# Altium PCB Peak Detector With Banking.PcbDoc (part 2 of 5)
Units mil, origin at the board's own origin, x right, y up, seen from the top; angles counter-clockwise.
Board outline 3330 x 2725 mil, 4 copper layers (TopLayer, GROUND, MidLayer1, BottomLayer); 549 components, 391 nets, 1594 pads, 460 vias.
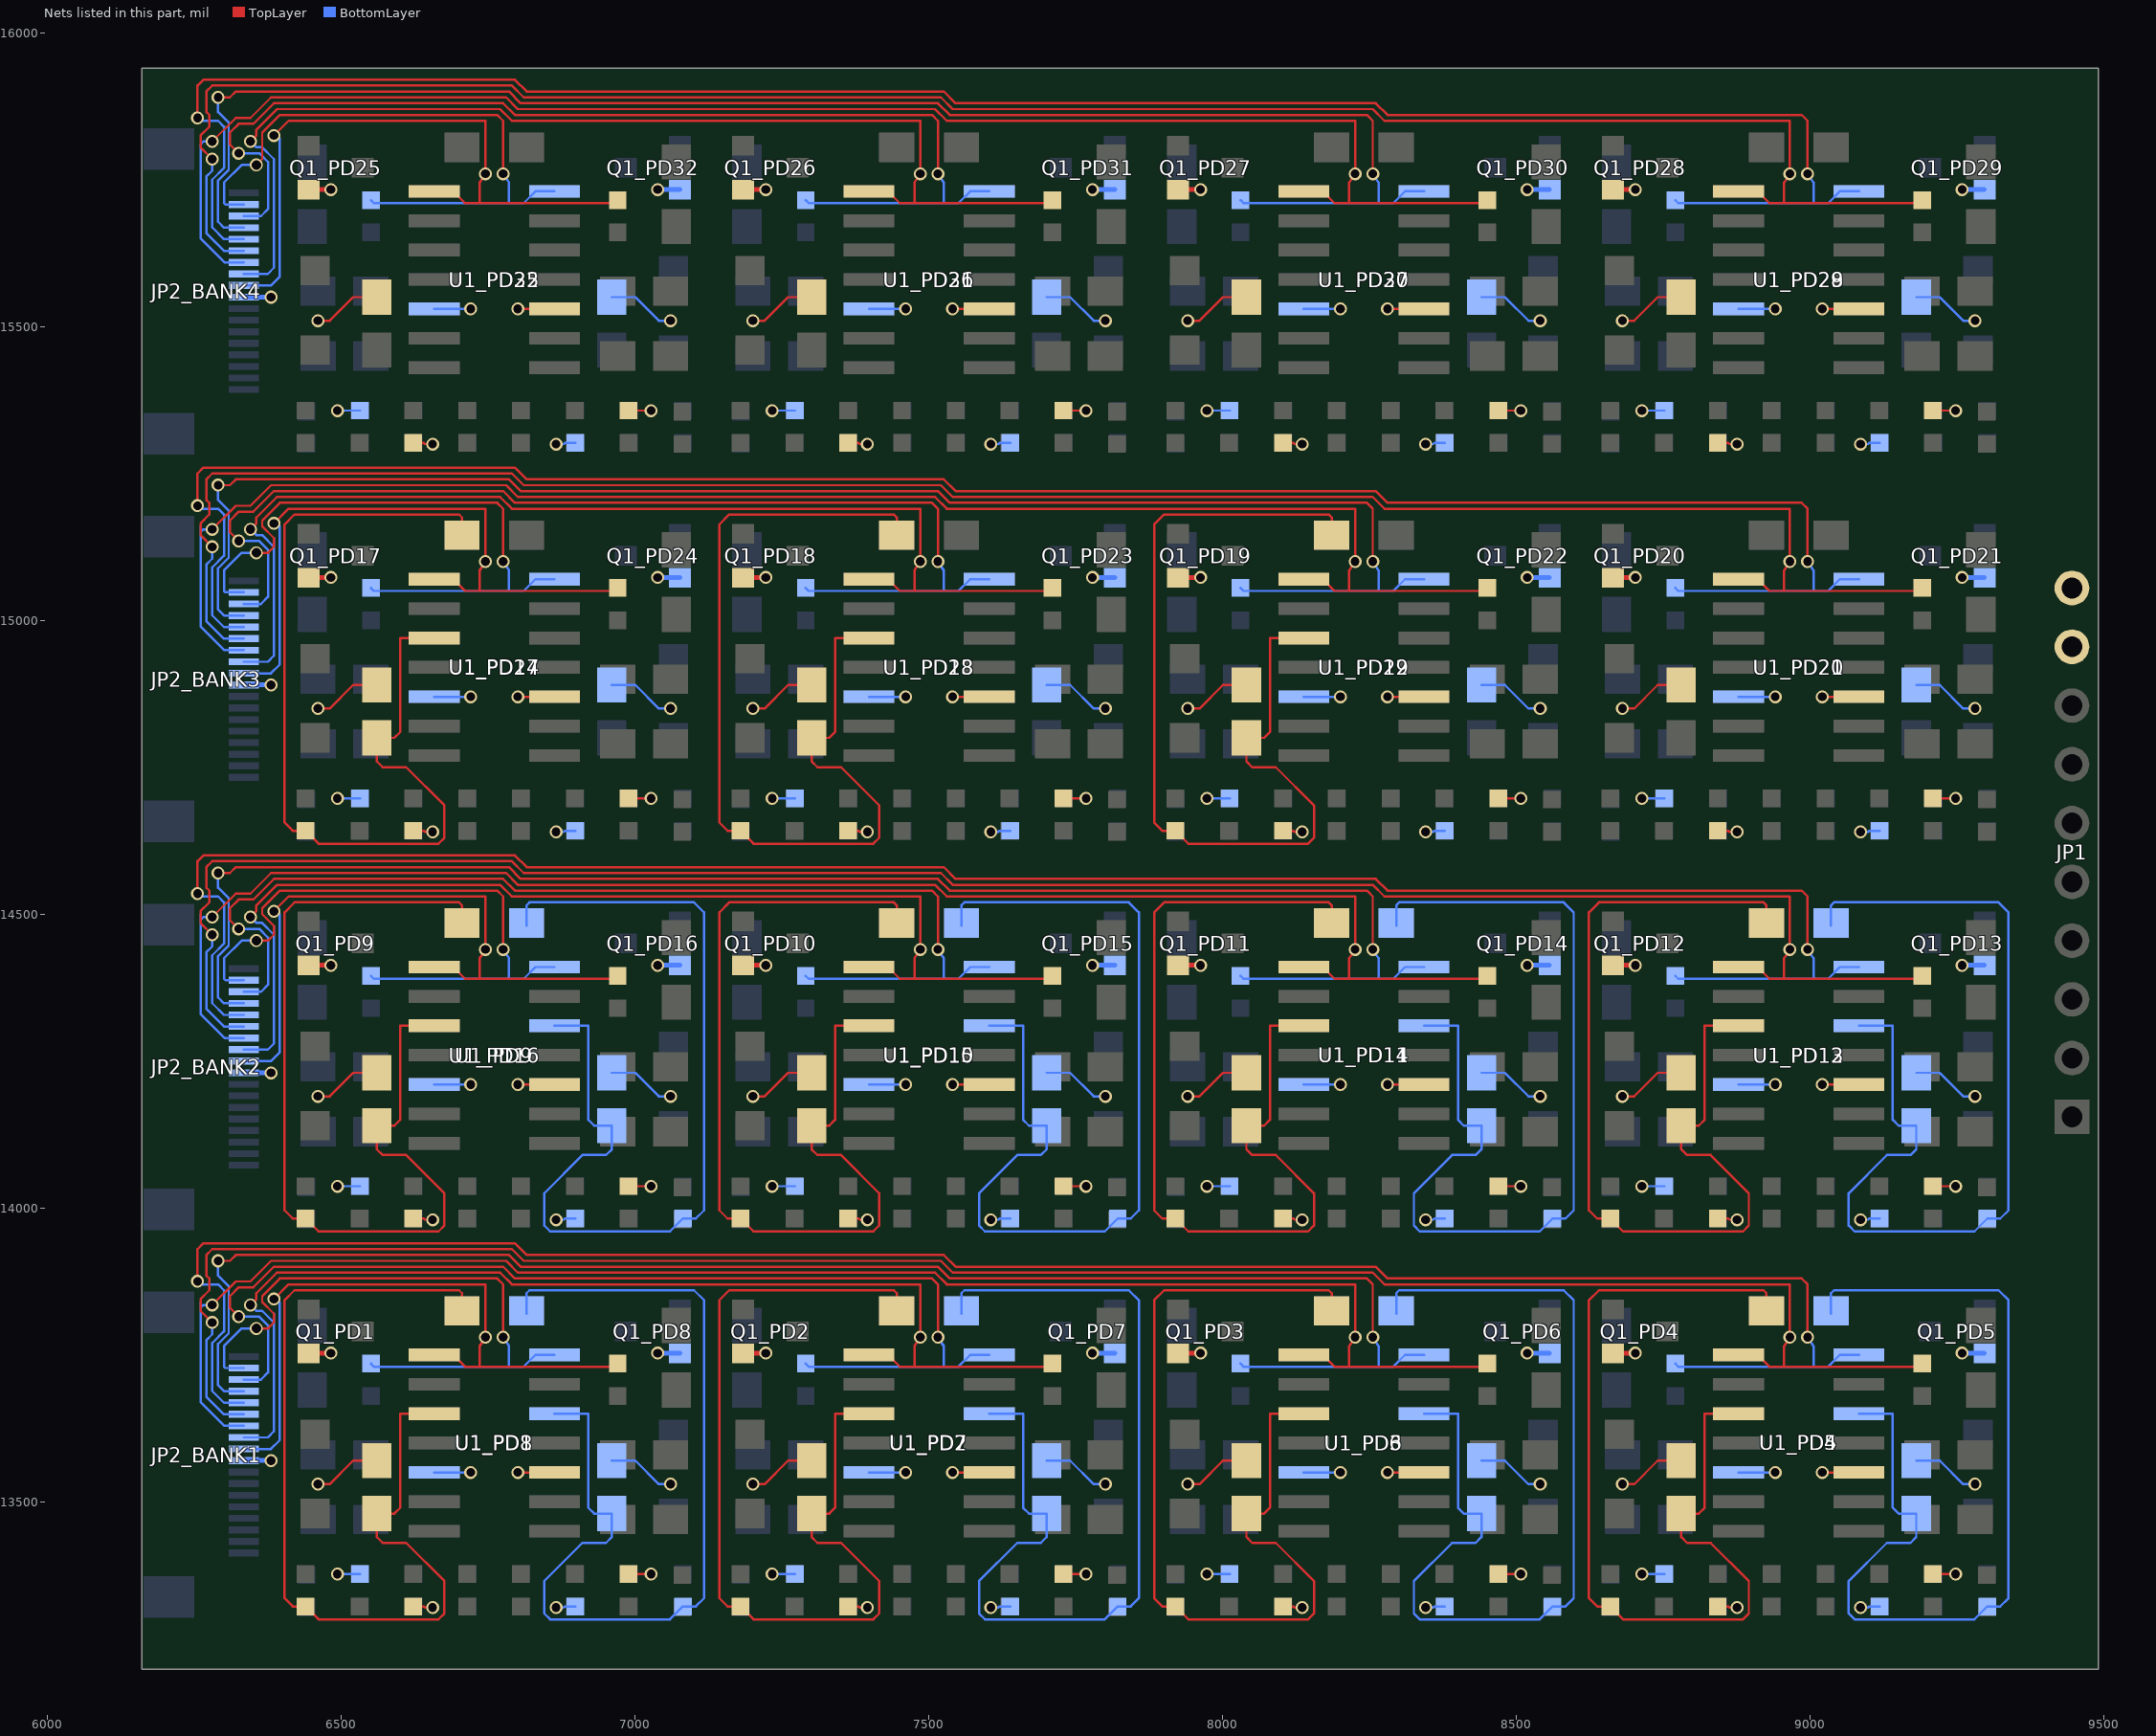
[diagram p4: the nets of this part, all layers, seen from the top]

## Components (designator, comment, footprint, x,y, rotation, side; value= is the part's Value field where it differs from the comment) (continued)
RPOT_PD16 "2.5K" 0603 6714.71,14036.99 r270 bottom (schematic designator RPOT)
RPOT_PD17 "2.5K" 0603 6805.29,14696.99 r270 top (schematic designator RPOT)
RPOT_PD18 "2.5K" 0603 7545.29,14696.99 r270 top (schematic designator RPOT)
RPOT_PD19 "2.5K" 0603 8285.29,14696.99 r270 top (schematic designator RPOT)
RPOT_PD20 "2.5K" 0603 9025.29,14696.99 r270 top (schematic designator RPOT)
RPOT_PD21 "2.5K" 0603 8934.71,14696.99 r270 bottom (schematic designator RPOT)
RPOT_PD22 "2.5K" 0603 8194.71,14696.99 r270 bottom (schematic designator RPOT)
RPOT_PD23 "2.5K" 0603 7454.71,14696.99 r270 bottom (schematic designator RPOT)
RPOT_PD24 "2.5K" 0603 6714.71,14696.99 r270 bottom (schematic designator RPOT)
RPOT_PD25 "2.5K" 0603 6805.29,15356.99 r270 top (schematic designator RPOT)
RPOT_PD26 "2.5K" 0603 7545.29,15356.99 r270 top (schematic designator RPOT)
RPOT_PD27 "2.5K" 0603 8285.29,15356.99 r270 top (schematic designator RPOT)
RPOT_PD28 "2.5K" 0603 9025.29,15356.99 r270 top (schematic designator RPOT)
RPOT_PD29 "2.5K" 0603 8934.71,15356.99 r270 bottom (schematic designator RPOT)
RPOT_PD30 "2.5K" 0603 8194.71,15356.99 r270 bottom (schematic designator RPOT)
RPOT_PD31 "2.5K" 0603 7454.71,15356.99 r270 bottom (schematic designator RPOT)
RPOT_PD32 "2.5K" 0603 6714.71,15356.99 r270 bottom (schematic designator RPOT)
U1_PD1 "TL074ACD" SO-G14/G3 6760,13600 r180 top (schematic designator U1)
U1_PD2 "TL074ACD" SO-G14/G3 7500,13600 r180 top (schematic designator U1)
U1_PD3 "TL074ACD" SO-G14/G3 8240,13600 r180 top (schematic designator U1)
U1_PD4 "TL074ACD" SO-G14/G3 8980,13600 r180 top (schematic designator U1)
U1_PD5 "TL074ACD" SO-G14/G3 8980,13600 r0 bottom (schematic designator U1)
U1_PD6 "TL074ACD" SO-G14/G3 8240,13600 r0 bottom (schematic designator U1)
U1_PD7 "TL074ACD" SO-G14/G3 7500,13600 r0 bottom (schematic designator U1)
U1_PD8 "TL074ACD" SO-G14/G3 6760,13600 r0 bottom (schematic designator U1)
U1_PD9 "TL074ACD" SO-G14/G3 6760,14260 r180 top (schematic designator U1)
U1_PD10 "TL074ACD" SO-G14/G3 7500,14260 r180 top (schematic designator U1)
U1_PD11 "TL074ACD" SO-G14/G3 8240,14260 r180 top (schematic designator U1)
U1_PD12 "TL074ACD" SO-G14/G3 8980,14260 r180 top (schematic designator U1)
U1_PD13 "TL074ACD" SO-G14/G3 8980,14260 r0 bottom (schematic designator U1)
U1_PD14 "TL074ACD" SO-G14/G3 8240,14260 r0 bottom (schematic designator U1)
U1_PD15 "TL074ACD" SO-G14/G3 7500,14260 r0 bottom (schematic designator U1)
U1_PD16 "TL074ACD" SO-G14/G3 6760,14260 r0 bottom (schematic designator U1)
U1_PD17 "TL074ACD" SO-G14/G3 6760,14920 r180 top (schematic designator U1)
U1_PD18 "TL074ACD" SO-G14/G3 7500,14920 r180 top (schematic designator U1)
U1_PD19 "TL074ACD" SO-G14/G3 8240,14920 r180 top (schematic designator U1)
U1_PD20 "TL074ACD" SO-G14/G3 8980,14920 r180 top (schematic designator U1)
U1_PD21 "TL074ACD" SO-G14/G3 8980,14920 r0 bottom (schematic designator U1)
U1_PD22 "TL074ACD" SO-G14/G3 8240,14920 r0 bottom (schematic designator U1)
U1_PD23 "TL074ACD" SO-G14/G3 7500,14920 r0 bottom (schematic designator U1)
U1_PD24 "TL074ACD" SO-G14/G3 6760,14920 r0 bottom (schematic designator U1)
U1_PD25 "TL074ACD" SO-G14/G3 6760,15580 r180 top (schematic designator U1)
U1_PD26 "TL074ACD" SO-G14/G3 7500,15580 r180 top (schematic designator U1)
U1_PD27 "TL074ACD" SO-G14/G3 8240,15580 r180 top (schematic designator U1)
U1_PD28 "TL074ACD" SO-G14/G3 8980,15580 r180 top (schematic designator U1)
U1_PD29 "TL074ACD" SO-G14/G3 8980,15580 r0 bottom (schematic designator U1)
U1_PD30 "TL074ACD" SO-G14/G3 8240,15580 r0 bottom (schematic designator U1)
U1_PD31 "TL074ACD" SO-G14/G3 7500,15580 r0 bottom (schematic designator U1)
U1_PD32 "TL074ACD" SO-G14/G3 6760,15580 r0 bottom (schematic designator U1)

## Footprints (in the part's own frame and the unit in brackets; to place one, negate y for a bottom-side part, rotate by r counter-clockwise, add the part's x,y. Pads: shape width x height; smd on the part's side, far side on the other; paste and mask are expansions set on the pad)
0603 [mil]
  rect 30x30 smd: 1(0,0) 2(55,0)
  silkscreen extent -35,-35 90,35
0805 [mil]
  rect 60x50 smd: 1(0.01,0) 2(90.01,0)
  silkscreen extent -50,-45 140,45
1206 [mil]
  rect 50x50 smd: 1(0,0) 2(135,0)
  silkscreen extent -50,-50 185,50
3216 [mil]
  rect 60x50 smd: 1(0.01,0) 2(-109.99,0)
  silkscreen extent -160,-45 50,45
FFC/SM0.5-2H18A [mm]
  rect 0.3x1.3 smd: 1(4.25,-1.625) 2(3.75,-1.625) 3(3.25,-1.625) 4(2.75,-1.625) 5(2.25,-1.625) 6(1.75,-1.625) 7(1.25,-1.625) 8(0.75,-1.625) 9(0.25,-1.625) 10(-0.25,-1.625) 11(-0.75,-1.625) 12(-1.25,-1.625) 13(-1.75,-1.625) 14(-2.25,-1.625) 15(-2.75,-1.625) 16(-3.25,-1.625) 17(-3.75,-1.625) 18(-4.25,-1.625)
  rect 1.8x2.2 smd: 19(6.15,1.625) 20(-6.15,1.625)
  silkscreen extent -6.75,-1.75 6.75,5.2
HDR1X10 [mm]
  rect 1.5x1.5 hole 0.9: 1(0,0)
  round 1.5 hole 0.9: 2(2.54,0) 3(5.08,0) 4(7.62,0) 5(10.16,0) 6(12.7,0) 7(15.24,0) 8(17.78,0) 9(20.32,0) 10(22.86,0)
  silkscreen extent -1.27,-1.27 24.13,1.27
SO-G3/D4.1 [mm]
  rect 0.85x0.95 smd: 1(0,1.175) 2(-0.95,-1.175) 3(0.95,-1.175)
  silkscreen extent -2,-2.05 2,2.83
SO-G14/G3 [mm]
  rect 2.2x0.55 smd: 1(-2.6,3.81) 2(-2.6,2.54) 3(-2.6,1.27) 4(-2.6,0) 5(-2.6,-1.27) 6(-2.6,-2.54) 7(-2.6,-3.81) 8(2.6,-3.81) 9(2.6,-2.54) 10(2.6,-1.27) 11(2.6,0) 12(2.6,1.27) 13(2.6,2.54) 14(2.6,3.81)
  silkscreen extent -1.1,-4.37 1.1,4.37

## Part data
C1_PD1 C1_PD2 C1_PD3 C1_PD4 C1_PD5 C1_PD6 C1_PD7 C1_PD8 C1_PD9 C1_PD10 C1_PD11 C1_PD12 C1_PD13 C1_PD14 C1_PD15 C1_PD16 C1_PD17 C1_PD18 C1_PD19 C1_PD20 C1_PD21 C1_PD22 C1_PD23 C1_PD24 C1_PD25 C1_PD26 C1_PD27 C1_PD28 C1_PD29 C1_PD30 C1_PD31 C1_PD32: library part CAP3, "Capacitor"
C4_PD1 C4_PD2 C4_PD3 C4_PD4 C4_PD5 C4_PD6 C4_PD7 C4_PD8 C4_PD9 C4_PD10 C4_PD11 C4_PD12 C4_PD13 C4_PD14 C4_PD15 C4_PD16 C4_PD17 C4_PD18 C4_PD19 C4_PD20 C4_PD21 C4_PD22 C4_PD23 C4_PD24 C4_PD25 C4_PD26 C4_PD27 C4_PD28 C4_PD29 C4_PD30 C4_PD31 C4_PD32 C5_PD1 C5_PD2 C5_PD3 C5_PD4 C5_PD5 C5_PD6 C5_PD7 C5_PD8 C5_PD9 C5_PD10 C5_PD11 C5_PD12 C5_PD13 C5_PD14 C5_PD15 C5_PD16 C5_PD17 C5_PD18 C5_PD19 C5_PD20 C5_PD21 C5_PD22 C5_PD23 C5_PD24 C5_PD25 C5_PD26 C5_PD27 C5_PD28 C5_PD29 C5_PD30 C5_PD31 C5_PD32 C6_PD1 C6_PD2 C6_PD3 C6_PD4 C6_PD5 C6_PD6 C6_PD7 C6_PD8 C6_PD9 C6_PD10 C6_PD11 C6_PD12 C6_PD13 C6_PD14 C6_PD15 C6_PD16 C6_PD17 C6_PD18 C6_PD19 C6_PD20 C6_PD21 C6_PD22 C6_PD23 C6_PD24 C6_PD25 C6_PD26 C6_PD27 C6_PD28 C6_PD29 C6_PD30 C6_PD31 C6_PD32: library part CAP, "Capacitor"
D1_PD1 D1_PD2 D1_PD3 D1_PD4 D1_PD5 D1_PD6 D1_PD7 D1_PD8 D1_PD9 D1_PD10 D1_PD11 D1_PD12 D1_PD13 D1_PD14 D1_PD15 D1_PD16 D1_PD17 D1_PD18 D1_PD19 D1_PD20 D1_PD21 D1_PD22 D1_PD23 D1_PD24 D1_PD25 D1_PD26 D1_PD27 D1_PD28 D1_PD29 D1_PD30 D1_PD31 D1_PD32 D2_PD1 D2_PD2 D2_PD3 D2_PD4 D2_PD5 D2_PD6 D2_PD7 D2_PD8 D2_PD9 D2_PD10 D2_PD11 D2_PD12 D2_PD13 D2_PD14 D2_PD15 D2_PD16 D2_PD17 D2_PD18 D2_PD19 D2_PD20 D2_PD21 D2_PD22 D2_PD23 D2_PD24 D2_PD25 D2_PD26 D2_PD27 D2_PD28 D2_PD29 D2_PD30 D2_PD31 D2_PD32: "Diode"
JP1: "Header, 10-Pin"
JP2_BANK1 JP2_BANK2 JP2_BANK3 JP2_BANK4: "Header, 9-Pin, Dual row"
Q1_PD1 Q1_PD2 Q1_PD3 Q1_PD4 Q1_PD5 Q1_PD6 Q1_PD7 Q1_PD8 Q1_PD9 Q1_PD10 Q1_PD11 Q1_PD12 Q1_PD13 Q1_PD14 Q1_PD15 Q1_PD16 Q1_PD17 Q1_PD18 Q1_PD19 Q1_PD20 Q1_PD21 Q1_PD22 Q1_PD23 Q1_PD24 Q1_PD25 Q1_PD26 Q1_PD27 Q1_PD28 Q1_PD29 Q1_PD30 Q1_PD31 Q1_PD32: "NPN BJT"
R1_PD1 R1_PD2 R1_PD3 R1_PD4 R1_PD5 R1_PD6 R1_PD7 R1_PD8 R1_PD9 R1_PD10 R1_PD11 R1_PD12 R1_PD13 R1_PD14 R1_PD15 R1_PD16 R1_PD17 R1_PD18 R1_PD19 R1_PD20 R1_PD21 R1_PD22 R1_PD23 R1_PD24 R1_PD25 R1_PD26 R1_PD27 R1_PD28 R1_PD29 R1_PD30 R1_PD31 R1_PD32 R2_PD1 R2_PD2 R2_PD3 R2_PD4 R2_PD5 R2_PD6 R2_PD7 R2_PD8 R2_PD9 R2_PD10 R2_PD11 R2_PD12 R2_PD13 R2_PD14 R2_PD15 R2_PD16 R2_PD17 R2_PD18 R2_PD19 R2_PD20 R2_PD21 R2_PD22 R2_PD23 R2_PD24 R2_PD25 R2_PD26 R2_PD27 R2_PD28 R2_PD29 R2_PD30 R2_PD31 R2_PD32 R3_PD1 R3_PD2 R3_PD3 R3_PD4 R3_PD5 R3_PD6 R3_PD7 R3_PD8 R3_PD9 R3_PD10 R3_PD11 R3_PD12 R3_PD13 R3_PD14 R3_PD15 R3_PD16 R3_PD17 R3_PD18 R3_PD19 R3_PD20 R3_PD21 R3_PD22 R3_PD23 R3_PD24 R3_PD25 R3_PD26 R3_PD27 R3_PD28 R3_PD29 R3_PD30 R3_PD31 R3_PD32 R4_PD1 R4_PD2 R4_PD3 R4_PD4 R4_PD5 R4_PD6 R4_PD7 R4_PD8 R4_PD9 R4_PD10 R4_PD11 R4_PD12 R4_PD13 R4_PD14 R4_PD15 R4_PD16 R4_PD17 R4_PD18 R4_PD19 R4_PD20 R4_PD21 R4_PD22 R4_PD23 R4_PD24 R4_PD25 R4_PD26 R4_PD27 R4_PD28 R4_PD29 R4_PD30 R4_PD31 R4_PD32 R5_PD1 R5_PD2 R5_PD3 R5_PD4 R5_PD5 R5_PD6 R5_PD7 R5_PD8 R5_PD9 R5_PD10 R5_PD11 R5_PD12 R5_PD13 R5_PD14 R5_PD15 R5_PD16 R5_PD17 R5_PD18 R5_PD19 R5_PD20 R5_PD21 R5_PD22 R5_PD23 R5_PD24 R5_PD25 R5_PD26 R5_PD27 R5_PD28 R5_PD29 R5_PD30 R5_PD31 R5_PD32 R6_PD1 R6_PD2 R6_PD3 R6_PD4 R6_PD5 R6_PD6 R6_PD7 R6_PD8 R6_PD9 R6_PD10 R6_PD11 R6_PD12 R6_PD13 R6_PD14 R6_PD15 R6_PD16 R6_PD17 R6_PD18 R6_PD19 R6_PD20 R6_PD21 R6_PD22 R6_PD23 R6_PD24 R6_PD25 R6_PD26 R6_PD27 R6_PD28 R6_PD29 R6_PD30 R6_PD31 R6_PD32 R8_PD1 R8_PD2 R8_PD3 R8_PD4 R8_PD5 R8_PD6 R8_PD7 R8_PD8 R8_PD9 R8_PD10 R8_PD11 R8_PD12 R8_PD13 R8_PD14 R8_PD15 R8_PD16 R8_PD17 R8_PD18 R8_PD19 R8_PD20 R8_PD21 R8_PD22 R8_PD23 R8_PD24 R8_PD25 R8_PD26 R8_PD27 R8_PD28 R8_PD29 R8_PD30 R8_PD31 R8_PD32 R88_PD1 R88_PD2 R88_PD3 R88_PD4 R88_PD5 R88_PD6 R88_PD7 R88_PD8 R88_PD9 R88_PD10 R88_PD11 R88_PD12 R88_PD13 R88_PD14 R88_PD15 R88_PD16 R88_PD17 R88_PD18 R88_PD19 R88_PD20 R88_PD21 R88_PD22 R88_PD23 R88_PD24 R88_PD25 R88_PD26 R88_PD27 R88_PD28 R88_PD29 R88_PD30 R88_PD31 R88_PD32 RPOT_PD1 RPOT_PD2 RPOT_PD3 RPOT_PD4 RPOT_PD5 RPOT_PD6 RPOT_PD7 RPOT_PD8 RPOT_PD9 RPOT_PD10 RPOT_PD11 RPOT_PD12 RPOT_PD13 RPOT_PD14 RPOT_PD15 RPOT_PD16 RPOT_PD17 RPOT_PD18 RPOT_PD19 RPOT_PD20 RPOT_PD21 RPOT_PD22 RPOT_PD23 RPOT_PD24 RPOT_PD25 RPOT_PD26 RPOT_PD27 RPOT_PD28 RPOT_PD29 RPOT_PD30 RPOT_PD31 RPOT_PD32: library part RES, "Resistor"
U1_PD1 U1_PD2 U1_PD3 U1_PD4 U1_PD5 U1_PD6 U1_PD7 U1_PD8 U1_PD9 U1_PD10 U1_PD11 U1_PD12 U1_PD13 U1_PD14 U1_PD15 U1_PD16 U1_PD17 U1_PD18 U1_PD19 U1_PD20 U1_PD21 U1_PD22 U1_PD23 U1_PD24 U1_PD25 U1_PD26 U1_PD27 U1_PD28 U1_PD29 U1_PD30 U1_PD31 U1_PD32: "Low-Noise J-FET Quad Operational Amplifier"

## Via types
v1: diameter 22, hole 15, TopLayer to BottomLayer, 432 vias
v2: diameter 22, hole 16, TopLayer to BottomLayer, 28 vias

## Nets (pads, with @x,y where several pads share a name; then routed paths per layer and width w, separated by ;. In a path a pad name is that pad's centre, name@x,y a point inside that pad or via, vN(x,y) a via of type N, cw(c..) or ccw(c..) an arc to the next point about the centre after c; other vN are vias at no path point)
GND: C6_PD1.1 C6_PD2.1 C6_PD3.1 C6_PD4.1 C6_PD5.1 C6_PD6.1 C6_PD7.1 C6_PD8.1 C6_PD9.1 C6_PD10.1 C6_PD11.1 C6_PD12.1 C6_PD13.1 C6_PD14.1 C6_PD15.1 C6_PD16.1 C6_PD17.1 C6_PD18.1 C6_PD19.1 C6_PD20.1 C6_PD21.1 C6_PD22.1 C6_PD23.1 C6_PD24.1 C6_PD25.1 C6_PD26.1 C6_PD27.1 C6_PD28.1 C6_PD29.1 C6_PD30.1 C6_PD31.1 C6_PD32.1 JP1.9 JP1.10 JP2_BANK1.9 JP2_BANK2.9 JP2_BANK3.9 JP2_BANK4.9 Q1_PD1.3 Q1_PD2.3 Q1_PD3.3 Q1_PD4.3 Q1_PD5.3 Q1_PD6.3 Q1_PD7.3 Q1_PD8.3 Q1_PD9.3 Q1_PD10.3 Q1_PD11.3 Q1_PD12.3 Q1_PD13.3 Q1_PD14.3 Q1_PD15.3 Q1_PD16.3 Q1_PD17.3 Q1_PD18.3 Q1_PD19.3 Q1_PD20.3 Q1_PD21.3 Q1_PD22.3 Q1_PD23.3 Q1_PD24.3 Q1_PD25.3 Q1_PD26.3 Q1_PD27.3 Q1_PD28.3 Q1_PD29.3 Q1_PD30.3 Q1_PD31.3 Q1_PD32.3 R3_PD1.1 R3_PD2.1 R3_PD3.1 R3_PD4.1 R3_PD5.1 R3_PD6.1 R3_PD7.1 R3_PD8.1 R3_PD9.1 R3_PD10.1 R3_PD11.1 R3_PD12.1 R3_PD13.1 R3_PD14.1 R3_PD15.1 R3_PD16.1 R3_PD17.1 R3_PD18.1 R3_PD19.1 R3_PD20.1 R3_PD21.1 R3_PD22.1 R3_PD23.1 R3_PD24.1 R3_PD25.1 R3_PD26.1 R3_PD27.1 R3_PD28.1 R3_PD29.1 R3_PD30.1 R3_PD31.1 R3_PD32.1 R6_PD1.2 R6_PD2.2 R6_PD3.2 R6_PD4.2 R6_PD5.2 R6_PD6.2 R6_PD7.2 R6_PD8.2 R6_PD9.2 R6_PD10.2 R6_PD11.2 R6_PD12.2 R6_PD13.2 R6_PD14.2 R6_PD15.2 R6_PD16.2 R6_PD17.2 R6_PD18.2 R6_PD19.2 R6_PD20.2 R6_PD21.2 R6_PD22.2 R6_PD23.2 R6_PD24.2 R6_PD25.2 R6_PD26.2 R6_PD27.2 R6_PD28.2 R6_PD29.2 R6_PD30.2 R6_PD31.2 R6_PD32.2 U1_PD1.3 U1_PD2.3 U1_PD3.3 U1_PD4.3 U1_PD5.3 U1_PD6.3 U1_PD7.3 U1_PD8.3 U1_PD9.3 U1_PD10.3 U1_PD11.3 U1_PD12.3 U1_PD13.3 U1_PD14.3 U1_PD15.3 U1_PD16.3 U1_PD17.3 U1_PD18.3 U1_PD19.3 U1_PD20.3 U1_PD21.3 U1_PD22.3 U1_PD23.3 U1_PD24.3 U1_PD25.3 U1_PD26.3 U1_PD27.3 U1_PD28.3 U1_PD29.3 U1_PD30.3 U1_PD31.3 U1_PD32.3 | length 9445.3
  TopLayer w4: Q1_PD1.3@6443.74,13752.6 Q1_PD1.3@6444.14,13752.6 ; Q1_PD9.3@6443.74,14412.6 Q1_PD9.3@6444.14,14412.6 ; Q1_PD17.3@6443.74,15072.6 Q1_PD17.3@6444.14,15072.6 ; Q1_PD25.3@6443.74,15732.6 Q1_PD25.3@6444.14,15732.6 ; v1(6460,13530) 6480,13530 6519.99,13569.99 C6_PD1.1@6560,13569.99 ; v1(6460,14190) 6480,14190 6519.99,14229.99 C6_PD9.1@6560,14229.99 ; v1(6460,14850) 6480,14850 6519.99,14889.99 C6_PD17.1@6560,14889.99 ; v1(6460,15510) 6480,15510 6519.99,15549.99 C6_PD25.1@6560,15549.99 ; R3_PD1.1@6622.14,13322 6640,13322 6642,13320 v1(6655,13320) ; R3_PD9.1@6622.14,13982 6640,13982 6642,13980 v1(6655,13980) ; R3_PD17.1@6622.14,14642 6640,14642 6642,14640 v1(6655,14640) ; R3_PD25.1@6622.14,15302 6640,15302 6642,15300 v1(6655,15300) ; v1(6800,13550) U1_PD1.3@6862.35,13550 ; v1(6800,14210) U1_PD9.3@6862.35,14210 ; v1(6800,14870) U1_PD17.3@6862.35,14870 ; v1(6800,15530) U1_PD25.3@6862.35,15530 ; R6_PD1.2@6988.43,13377 v1(7027,13377) ; R6_PD9.2@6988.43,14037 v1(7027,14037) ; R6_PD17.2@6988.43,14697 v1(7027,14697) ; R6_PD25.2@6988.43,15357 v1(7027,15357) ; Q1_PD2.3@7183.74,13752.6 Q1_PD2.3@7184.14,13752.6 ; Q1_PD10.3@7183.74,14412.6 Q1_PD10.3@7184.14,14412.6 ; Q1_PD18.3@7183.74,15072.6 Q1_PD18.3@7184.14,15072.6 ; Q1_PD26.3@7183.74,15732.6 Q1_PD26.3@7184.14,15732.6 ; v1(7200,13530) 7220,13530 7259.99,13569.99 C6_PD2.1@7300,13569.99 ; v1(7200,14190) 7220,14190 7259.99,14229.99 C6_PD10.1@7300,14229.99 ; v1(7200,14850) 7220,14850 7259.99,14889.99 C6_PD18.1@7300,14889.99 ; v1(7200,15510) 7220,15510 7259.99,15549.99 C6_PD26.1@7300,15549.99 ; R3_PD2.1@7362.14,13322 7380,13322 7382,13320 v1(7395,13320) ; R3_PD10.1@7362.14,13982 7380,13982 7382,13980 v1(7395,13980) ; R3_PD18.1@7362.14,14642 7380,14642 7382,14640 v1(7395,14640) ; R3_PD26.1@7362.14,15302 7380,15302 7382,15300 v1(7395,15300) ; v1(7540,13550) U1_PD2.3@7602.35,13550 ; v1(7540,14210) U1_PD10.3@7602.35,14210 ; v1(7540,14870) U1_PD18.3@7602.35,14870 ; v1(7540,15530) U1_PD26.3@7602.35,15530 ; R6_PD2.2@7728.43,13377 v1(7767,13377) ; R6_PD10.2@7728.43,14037 v1(7767,14037) ; R6_PD18.2@7728.43,14697 v1(7767,14697) ; R6_PD26.2@7728.43,15357 v1(7767,15357) ; Q1_PD3.3@7923.74,13752.6 Q1_PD3.3@7924.14,13752.6 ; Q1_PD11.3@7923.74,14412.6 Q1_PD11.3@7924.14,14412.6 ; Q1_PD19.3@7923.74,15072.6 Q1_PD19.3@7924.14,15072.6 ; Q1_PD27.3@7923.74,15732.6 Q1_PD27.3@7924.14,15732.6 ; v1(7940,13530) 7960,13530 7999.99,13569.99 C6_PD3.1@8040,13569.99 ; v1(7940,14190) 7960,14190 7999.99,14229.99 C6_PD11.1@8040,14229.99 ; v1(7940,14850) 7960,14850 7999.99,14889.99 C6_PD19.1@8040,14889.99 ; v1(7940,15510) 7960,15510 7999.99,15549.99 C6_PD27.1@8040,15549.99 ; R3_PD3.1@8102.14,13322 8120,13322 8122,13320 v1(8135,13320) ; R3_PD11.1@8102.14,13982 8120,13982 8122,13980 v1(8135,13980) ; R3_PD19.1@8102.14,14642 8120,14642 8122,14640 v1(8135,14640) ; R3_PD27.1@8102.14,15302 8120,15302 8122,15300 v1(8135,15300) ; v1(8280,13550) U1_PD3.3@8342.35,13550 ; v1(8280,14210) U1_PD11.3@8342.35,14210 ; v1(8280,14870) U1_PD19.3@8342.35,14870 ; v1(8280,15530) U1_PD27.3@8342.35,15530 ; R6_PD3.2@8468.43,13377 v1(8507,13377) ; R6_PD11.2@8468.43,14037 v1(8507,14037) ; R6_PD19.2@8468.43,14697 v1(8507,14697) ; R6_PD27.2@8468.43,15357 v1(8507,15357) ; Q1_PD4.3@8663.74,13752.6 Q1_PD4.3@8664.14,13752.6 ; Q1_PD12.3@8663.74,14412.6 Q1_PD12.3@8664.14,14412.6 ; Q1_PD20.3@8663.74,15072.6 Q1_PD20.3@8664.14,15072.6 ; Q1_PD28.3@8663.74,15732.6 Q1_PD28.3@8664.14,15732.6 ; v1(8680,13530) 8700,13530 8739.99,13569.99 C6_PD4.1@8780,13569.99 ; v1(8680,14190) 8700,14190 8739.99,14229.99 C6_PD12.1@8780,14229.99 ; v1(8680,14850) 8700,14850 8739.99,14889.99 C6_PD20.1@8780,14889.99 ; v1(8680,15510) 8700,15510 8739.99,15549.99 C6_PD28.1@8780,15549.99 ; R3_PD4.1@8842.14,13322 8860,13322 8862,13320 v1(8875,13320) ; R3_PD12.1@8842.14,13982 8860,13982 8862,13980 v1(8875,13980) ; R3_PD20.1@8842.14,14642 8860,14642 8862,14640 v1(8875,14640) ; R3_PD28.1@8842.14,15302 8860,15302 8862,15300 v1(8875,15300) ; v1(9020,13550) U1_PD4.3@9082.35,13550 ; v1(9020,14210) U1_PD12.3@9082.35,14210 ; v1(9020,14870) U1_PD20.3@9082.35,14870 ; v1(9020,15530) U1_PD28.3@9082.35,15530 ; R6_PD4.2@9208.43,13377 v1(9247,13377) ; R6_PD12.2@9208.43,14037 v1(9247,14037) ; R6_PD20.2@9208.43,14697 v1(9247,14697) ; R6_PD28.2@9208.43,15357 v1(9247,15357)
  TopLayer w8: Q1_PD1.3@6444.14,13753 v1(6482,13753) ; Q1_PD9.3@6444.14,14413 v1(6482,14413) ; Q1_PD17.3@6444.14,15073 v1(6482,15073) ; Q1_PD25.3@6444.14,15733 v1(6482,15733) ; Q1_PD2.3@7184.14,13753 v1(7222,13753) ; Q1_PD10.3@7184.14,14413 v1(7222,14413) ; Q1_PD18.3@7184.14,15073 v1(7222,15073) ; Q1_PD26.3@7184.14,15733 v1(7222,15733) ; Q1_PD3.3@7924.14,13753 v1(7962,13753) ; Q1_PD11.3@7924.14,14413 v1(7962,14413) ; Q1_PD19.3@7924.14,15073 v1(7962,15073) ; Q1_PD27.3@7924.14,15733 v1(7962,15733) ; Q1_PD4.3@8664.14,13753 v1(8702,13753) ; Q1_PD12.3@8664.14,14413 v1(8702,14413) ; Q1_PD20.3@8664.14,15073 v1(8702,15073) ; Q1_PD28.3@8664.14,15733 v1(8702,15733)
  BottomLayer w4: v1(6493,13377) R6_PD8.2@6531.57,13377 ; v1(6493,14037) R6_PD16.2@6531.57,14037 ; v1(6493,14697) R6_PD24.2@6531.57,14697 ; v1(6493,15357) R6_PD32.2@6531.57,15357 ; U1_PD8.3@6657.65,13550 v1(6720,13550) ; U1_PD16.3@6657.65,14210 v1(6720,14210) ; U1_PD24.3@6657.65,14870 v1(6720,14870) ; U1_PD32.3@6657.65,15530 v1(6720,15530) ; v1(6865,13320) 6878,13320 6880,13322 R3_PD8.1@6897.86,13322 ; v1(6865,13980) 6878,13980 6880,13982 R3_PD16.1@6897.86,13982 ; v1(6865,14640) 6878,14640 6880,14642 R3_PD24.1@6897.86,14642 ; v1(6865,15300) 6878,15300 6880,15302 R3_PD32.1@6897.86,15302 ; C6_PD8.1@6960,13569.99 7000.01,13569.99 7040,13530 v1(7060,13530) ; C6_PD16.1@6960,14229.99 7000.01,14229.99 7040,14190 v1(7060,14190) ; C6_PD24.1@6960,14889.99 7000.01,14889.99 7040,14850 v1(7060,14850) ; C6_PD32.1@6960,15549.99 7000.01,15549.99 7040,15510 v1(7060,15510) ; Q1_PD8.3@7075.86,13752.6 Q1_PD8.3@7076.26,13752.6 ; Q1_PD16.3@7075.86,14412.6 Q1_PD16.3@7076.26,14412.6 ; Q1_PD24.3@7075.86,15072.6 Q1_PD24.3@7076.26,15072.6 ; Q1_PD32.3@7075.86,15732.6 Q1_PD32.3@7076.26,15732.6 ; v1(7233,13377) R6_PD7.2@7271.57,13377 ; v1(7233,14037) R6_PD15.2@7271.57,14037 ; v1(7233,14697) R6_PD23.2@7271.57,14697 ; v1(7233,15357) R6_PD31.2@7271.57,15357 ; U1_PD7.3@7397.65,13550 v1(7460,13550) ; U1_PD15.3@7397.65,14210 v1(7460,14210) ; U1_PD23.3@7397.65,14870 v1(7460,14870) ; U1_PD31.3@7397.65,15530 v1(7460,15530) ; v1(7605,13320) 7618,13320 7620,13322 R3_PD7.1@7637.86,13322 ; v1(7605,13980) 7618,13980 7620,13982 R3_PD15.1@7637.86,13982 ; v1(7605,14640) 7618,14640 7620,14642 R3_PD23.1@7637.86,14642 ; v1(7605,15300) 7618,15300 7620,15302 R3_PD31.1@7637.86,15302 ; C6_PD7.1@7700,13569.99 7740.01,13569.99 7780,13530 v1(7800,13530) ; C6_PD15.1@7700,14229.99 7740.01,14229.99 7780,14190 v1(7800,14190) ; C6_PD23.1@7700,14889.99 7740.01,14889.99 7780,14850 v1(7800,14850) ; C6_PD31.1@7700,15549.99 7740.01,15549.99 7780,15510 v1(7800,15510) ; Q1_PD7.3@7815.86,13752.6 Q1_PD7.3@7816.26,13752.6 ; Q1_PD15.3@7815.86,14412.6 Q1_PD15.3@7816.26,14412.6 ; Q1_PD23.3@7815.86,15072.6 Q1_PD23.3@7816.26,15072.6 ; Q1_PD31.3@7815.86,15732.6 Q1_PD31.3@7816.26,15732.6 ; v1(7973,13377) R6_PD6.2@8011.57,13377 ; v1(7973,14037) R6_PD14.2@8011.57,14037 ; v1(7973,14697) R6_PD22.2@8011.57,14697 ; v1(7973,15357) R6_PD30.2@8011.57,15357 ; U1_PD6.3@8137.65,13550 v1(8200,13550) ; U1_PD14.3@8137.65,14210 v1(8200,14210) ; U1_PD22.3@8137.65,14870 v1(8200,14870) ; U1_PD30.3@8137.65,15530 v1(8200,15530) ; v1(8345,13320) 8358,13320 8360,13322 R3_PD6.1@8377.86,13322 ; v1(8345,13980) 8358,13980 8360,13982 R3_PD14.1@8377.86,13982 ; v1(8345,14640) 8358,14640 8360,14642 R3_PD22.1@8377.86,14642 ; v1(8345,15300) 8358,15300 8360,15302 R3_PD30.1@8377.86,15302 ; C6_PD6.1@8440,13569.99 8480.01,13569.99 8520,13530 v1(8540,13530) ; C6_PD14.1@8440,14229.99 8480.01,14229.99 8520,14190 v1(8540,14190) ; C6_PD22.1@8440,14889.99 8480.01,14889.99 8520,14850 v1(8540,14850) ; C6_PD30.1@8440,15549.99 8480.01,15549.99 8520,15510 v1(8540,15510) ; Q1_PD6.3@8555.86,13752.6 Q1_PD6.3@8556.26,13752.6 ; Q1_PD14.3@8555.86,14412.6 Q1_PD14.3@8556.26,14412.6 ; Q1_PD22.3@8555.86,15072.6 Q1_PD22.3@8556.26,15072.6 ; Q1_PD30.3@8555.86,15732.6 Q1_PD30.3@8556.26,15732.6 ; v1(8713,13377) R6_PD5.2@8751.57,13377 ; v1(8713,14037) R6_PD13.2@8751.57,14037 ; v1(8713,14697) R6_PD21.2@8751.57,14697 ; v1(8713,15357) R6_PD29.2@8751.57,15357 ; U1_PD5.3@8877.65,13550 v1(8940,13550) ; U1_PD13.3@8877.65,14210 v1(8940,14210) ; U1_PD21.3@8877.65,14870 v1(8940,14870) ; U1_PD29.3@8877.65,15530 v1(8940,15530) ; v1(9085,13320) 9098,13320 9100,13322 R3_PD5.1@9117.86,13322 ; v1(9085,13980) 9098,13980 9100,13982 R3_PD13.1@9117.86,13982 ; v1(9085,14640) 9098,14640 9100,14642 R3_PD21.1@9117.86,14642 ; v1(9085,15300) 9098,15300 9100,15302 R3_PD29.1@9117.86,15302 ; C6_PD5.1@9180,13569.99 9220.01,13569.99 9260,13530 v1(9280,13530) ; C6_PD13.1@9180,14229.99 9220.01,14229.99 9260,14190 v1(9280,14190) ; C6_PD21.1@9180,14889.99 9220.01,14889.99 9260,14850 v1(9280,14850) ; C6_PD29.1@9180,15549.99 9220.01,15549.99 9260,15510 v1(9280,15510) ; Q1_PD5.3@9295.86,13752.6 Q1_PD5.3@9296.26,13752.6 ; Q1_PD13.3@9295.86,14412.6 Q1_PD13.3@9296.26,14412.6 ; Q1_PD21.3@9295.86,15072.6 Q1_PD21.3@9296.26,15072.6 ; Q1_PD29.3@9295.86,15732.6 Q1_PD29.3@9296.26,15732.6
  BottomLayer w8: JP2_BANK1.9@6333.98,13570.16 v1@6379.84,13570.16 ; JP2_BANK2.9@6333.98,14230.16 v1@6379.84,14230.16 ; JP2_BANK3.9@6333.98,14890.16 v1@6379.84,14890.16 ; JP2_BANK4.9@6333.98,15550.16 v1@6379.84,15550.16 ; v1(7038,13753) Q1_PD8.3@7075.86,13753 ; v1(7038,14413) Q1_PD16.3@7075.86,14413 ; v1(7038,15073) Q1_PD24.3@7075.86,15073 ; v1(7038,15733) Q1_PD32.3@7075.86,15733 ; v1(7778,13753) Q1_PD7.3@7815.86,13753 ; v1(7778,14413) Q1_PD15.3@7815.86,14413 ; v1(7778,15073) Q1_PD23.3@7815.86,15073 ; v1(7778,15733) Q1_PD31.3@7815.86,15733 ; v1(8518,13753) Q1_PD6.3@8555.86,13753 ; v1(8518,14413) Q1_PD14.3@8555.86,14413 ; v1(8518,15073) Q1_PD22.3@8555.86,15073 ; v1(8518,15733) Q1_PD30.3@8555.86,15733 ; v1(9258,13753) Q1_PD5.3@9295.86,13753 ; v1(9258,14413) Q1_PD13.3@9295.86,14413 ; v1(9258,15073) Q1_PD21.3@9295.86,15073 ; v1(9258,15733) Q1_PD29.3@9295.86,15733
  other v1: 6380,13570 6380,14230 6380,14890 6380,15550
K1_BANK1: JP2_BANK1.10 R88_PD1.2 U1_PD1.8 | length 1149.6
  TopLayer w4: v1(6385,13845) 6410,13870 6745,13870 v1(6745,13780) 6735,13765 6735,13730 ; U1_PD1.8@6657.63,13750 6690,13750 6710,13730 6735,13730 ; R88_PD1.2@6970,13735 6965,13730 6735,13730
  BottomLayer w4: JP2_BANK1.10@6333.98,13589.84 6379.84,13589.84 6395,13605 6395,13840 v1(6385,13845)
K1_BANK2: JP2_BANK2.10 R88_PD9.2 U1_PD9.8 | length 1149.6
  TopLayer w4: v1(6385,14505) 6410,14530 6745,14530 v1(6745,14440) 6735,14425 6735,14390 ; U1_PD9.8@6657.63,14410 6690,14410 6710,14390 6735,14390 ; R88_PD9.2@6970,14395 6965,14390 6735,14390
  BottomLayer w4: JP2_BANK2.10@6333.98,14249.84 6379.84,14249.84 6395,14265 6395,14500 v1(6385,14505)
K1_BANK3: JP2_BANK3.10 R88_PD17.2 U1_PD17.8 | length 1149.6
  TopLayer w4: v1(6385,15165) 6410,15190 6745,15190 v1(6745,15100) 6735,15085 6735,15050 ; U1_PD17.8@6657.63,15070 6690,15070 6710,15050 6735,15050 ; R88_PD17.2@6970,15055 6965,15050 6735,15050
  BottomLayer w4: JP2_BANK3.10@6333.98,14909.84 6379.84,14909.84 6395,14925 6395,15160 v1(6385,15165)
K1_BANK4: JP2_BANK4.10 R88_PD25.2 U1_PD25.8 | length 1149.6
  TopLayer w4: v1(6385,15825) 6410,15850 6745,15850 v1(6745,15760) 6735,15745 6735,15710 ; U1_PD25.8@6657.63,15730 6690,15730 6710,15710 6735,15710 ; R88_PD25.2@6970,15715 6965,15710 6735,15710
  BottomLayer w4: JP2_BANK4.10@6333.98,15569.84 6379.84,15569.84 6395,15585 6395,15820 v1(6385,15825)
K2_BANK1: JP2_BANK1.11 R88_PD2.2 U1_PD2.8 | length 1950.5
  TopLayer w4: v2(6345,13835) 6355,13845 6355,13855 6390,13890 6770,13890 6790,13870 7485,13870 v1(7485,13780) 7475,13765 7475,13730 ; U1_PD2.8@7397.63,13750 7430,13750 7450,13730 7475,13730 ; R88_PD2.2@7710,13735 7705,13730 7475,13730
  BottomLayer w4: JP2_BANK1.11@6333.98,13609.53 6374.53,13609.53 6385,13620 6385,13805 ; v2(6345,13835) 6355,13825 6365,13825 6385,13805 ; 6385,13820 6385,13805
K2_BANK2: JP2_BANK2.11 R88_PD10.2 U1_PD10.8 | length 1950.5
  TopLayer w4: v2(6345,14495) 6355,14505 6355,14515 6390,14550 6770,14550 6790,14530 7485,14530 v1(7485,14440) 7475,14425 7475,14390 ; U1_PD10.8@7397.63,14410 7430,14410 7450,14390 7475,14390 ; R88_PD10.2@7710,14395 7705,14390 7475,14390
  BottomLayer w4: JP2_BANK2.11@6333.98,14269.53 6374.53,14269.53 6385,14280 6385,14465 ; v2(6345,14495) 6355,14485 6365,14485 6385,14465 ; 6385,14480 6385,14465
K2_BANK3: JP2_BANK3.11 R88_PD18.2 U1_PD18.8 | length 1950.5
  TopLayer w4: v2(6345,15155) 6355,15165 6355,15175 6390,15210 6770,15210 6790,15190 7485,15190 v1(7485,15100) 7475,15085 7475,15050 ; U1_PD18.8@7397.63,15070 7430,15070 7450,15050 7475,15050 ; R88_PD18.2@7710,15055 7705,15050 7475,15050
  BottomLayer w4: JP2_BANK3.11@6333.98,14929.53 6374.53,14929.53 6385,14940 6385,15125 ; v2(6345,15155) 6355,15145 6365,15145 6385,15125 ; 6385,15140 6385,15125
K2_BANK4: JP2_BANK4.11 R88_PD26.2 U1_PD26.8 | length 1935.5
  TopLayer w4: v2(6345,15815) 6355,15825 6355,15835 6390,15870 6770,15870 6790,15850 7485,15850 v1(7485,15760) 7475,15745 7475,15710 ; U1_PD26.8@7397.63,15730 7430,15730 7450,15710 7475,15710 ; R88_PD26.2@7710,15715 7705,15710 7475,15710
  BottomLayer w4: JP2_BANK4.11@6333.98,15589.53 6374.53,15589.53 6385,15600 6385,15785 6365,15805 6355,15805 v2(6345,15815)
K3_BANK1: JP2_BANK1.12 R88_PD3.2 U1_PD3.8 | length 2741.3
  TopLayer w4: v1(6280,13835) 6320,13875 6345,13875 6380,13910 6780,13910 6800,13890 7510,13890 7530,13870 8225,13870 v1(8225,13780) 8215,13765 8215,13730 ; U1_PD3.8@8137.63,13750 8170,13750 8190,13730 8215,13730 ; R88_PD3.2@8450,13735 8445,13730 8215,13730
  BottomLayer w4: 6260,13840 6260,13830 ; v1(6280,13835) 6265,13835 6260,13830 ; JP2_BANK1.12@6333.98,13629.21 6300.79,13629.21 6260,13670 6260,13830
K3_BANK2: JP2_BANK2.12 R88_PD11.2 U1_PD11.8 | length 2741.3
  TopLayer w4: v1(6280,14495) 6320,14535 6345,14535 6380,14570 6780,14570 6800,14550 7510,14550 7530,14530 8225,14530 v1(8225,14440) 8215,14425 8215,14390 ; U1_PD11.8@8137.63,14410 8170,14410 8190,14390 8215,14390 ; R88_PD11.2@8450,14395 8445,14390 8215,14390
  BottomLayer w4: 6260,14500 6260,14490 ; v1(6280,14495) 6265,14495 6260,14490 ; JP2_BANK2.12@6333.98,14289.21 6300.79,14289.21 6260,14330 6260,14490
K3_BANK3: JP2_BANK3.12 R88_PD19.2 U1_PD19.8 | length 2741.3
  TopLayer w4: v1(6280,15155) 6320,15195 6345,15195 6380,15230 6780,15230 6800,15210 7510,15210 7530,15190 8225,15190 v1(8225,15100) 8215,15085 8215,15050 ; U1_PD19.8@8137.63,15070 8170,15070 8190,15050 8215,15050 ; R88_PD19.2@8450,15055 8445,15050 8215,15050
  BottomLayer w4: 6260,15160 6260,15150 ; v1(6280,15155) 6265,15155 6260,15150 ; JP2_BANK3.12@6333.98,14949.21 6300.79,14949.21 6260,14990 6260,15150
K3_BANK4: JP2_BANK4.12 R88_PD27.2 U1_PD27.8 | length 2731.3
  TopLayer w4: v1(6280,15815) 6320,15855 6345,15855 6380,15890 6780,15890 6800,15870 7510,15870 7530,15850 8225,15850 v1(8225,15760) 8215,15745 8215,15710 ; U1_PD27.8@8137.63,15730 8170,15730 8190,15710 8215,15710 ; R88_PD27.2@8450,15715 8445,15710 8215,15710
  BottomLayer w4: v1(6280,15815) 6265,15815 6260,15810 6260,15650 6300.79,15609.21 JP2_BANK4.12@6333.98,15609.21
K4_BANK1: JP2_BANK1.13 R88_PD4.2 U1_PD4.8 | length 3528
  TopLayer w4: v1(6280,13805) 6260,13825 6260,13845 6275,13860 6275,13880 6270,13885 6270,13920 6280,13930 6790,13930 6810,13910 7520,13910 7540,13890 8255,13890 8275,13870 8965,13870 v1(8965,13780) 8955,13765 8955,13730 ; U1_PD4.8@8877.63,13750 8910,13750 8930,13730 8955,13730 ; R88_PD4.2@9190,13735 9185,13730 8955,13730
  BottomLayer w4: v1(6280,13805) 6280,13785 6270,13775 6270,13678.9 6300,13648.9 JP2_BANK1.13@6333.98,13648.9
K4_BANK2: JP2_BANK2.13 R88_PD12.2 U1_PD12.8 | length 3528
  TopLayer w4: v1(6280,14465) 6260,14485 6260,14505 6275,14520 6275,14540 6270,14545 6270,14580 6280,14590 6790,14590 6810,14570 7520,14570 7540,14550 8255,14550 8275,14530 8965,14530 v1(8965,14440) 8955,14425 8955,14390 ; U1_PD12.8@8877.63,14410 8910,14410 8930,14390 8955,14390 ; R88_PD12.2@9190,14395 9185,14390 8955,14390
  BottomLayer w4: v1(6280,14465) 6280,14445 6270,14435 6270,14338.9 6300,14308.9 JP2_BANK2.13@6333.98,14308.9
K4_BANK3: JP2_BANK3.13 R88_PD20.2 U1_PD20.8 | length 3528
  TopLayer w4: v1(6280,15125) 6260,15145 6260,15165 6275,15180 6275,15200 6270,15205 6270,15240 6280,15250 6790,15250 6810,15230 7520,15230 7540,15210 8255,15210 8275,15190 8965,15190 v1(8965,15100) 8955,15085 8955,15050 ; U1_PD20.8@8877.63,15070 8910,15070 8930,15050 8955,15050 ; R88_PD20.2@9190,15055 9185,15050 8955,15050
  BottomLayer w4: v1(6280,15125) 6280,15105 6270,15095 6270,14998.9 6300,14968.9 JP2_BANK3.13@6333.98,14968.9
K4_BANK4: JP2_BANK4.13 R88_PD28.2 U1_PD28.8 | length 3528
  TopLayer w4: v1(6280,15785) 6260,15805 6260,15825 6275,15840 6275,15860 6270,15865 6270,15900 6280,15910 6790,15910 6810,15890 7520,15890 7540,15870 8255,15870 8275,15850 8965,15850 v1(8965,15760) 8955,15745 8955,15710 ; U1_PD28.8@8877.63,15730 8910,15730 8930,15710 8955,15710 ; R88_PD28.2@9190,15715 9185,15710 8955,15710
  BottomLayer w4: v1(6280,15785) 6280,15765 6270,15755 6270,15658.9 6300,15628.9 JP2_BANK4.13@6333.98,15628.9
K5_BANK1: JP2_BANK1.14 R88_PD5.2 U1_PD5.8 | length 3587.1
  TopLayer w4: v1(6255,13875) 6255,13930 6265,13940 6795,13940 6815,13920 7525,13920 7545,13900 8260,13900 8280,13880 8985,13880 8995,13870 v1(8995,13780)
  BottomLayer w4: v1(6255,13875) 6260,13870 6290,13870 6300,13860 6300,13790 6280,13770 6280,13688.58 6300,13668.58 JP2_BANK1.14@6333.98,13668.58 ; R88_PD5.2@8770,13735 8775,13730 9005,13730 ; v1(8995,13780) 9005,13765 9005,13730 ; U1_PD5.8@9082.37,13750 9050,13750 9030,13730 9005,13730
K5_BANK2: JP2_BANK2.14 R88_PD13.2 U1_PD13.8 | length 3587.1
  TopLayer w4: v1(6255,14535) 6255,14590 6265,14600 6795,14600 6815,14580 7525,14580 7545,14560 8260,14560 8280,14540 8985,14540 8995,14530 v1(8995,14440)
  BottomLayer w4: v1(6255,14535) 6260,14530 6290,14530 6300,14520 6300,14450 6280,14430 6280,14348.58 6300,14328.58 JP2_BANK2.14@6333.98,14328.58 ; R88_PD13.2@8770,14395 8775,14390 9005,14390 ; v1(8995,14440) 9005,14425 9005,14390 ; U1_PD13.8@9082.37,14410 9050,14410 9030,14390 9005,14390
K5_BANK3: JP2_BANK3.14 R88_PD21.2 U1_PD21.8 | length 3587.1
  TopLayer w4: v1(6255,15195) 6255,15250 6265,15260 6795,15260 6815,15240 7525,15240 7545,15220 8260,15220 8280,15200 8985,15200 8995,15190 v1(8995,15100)
  BottomLayer w4: v1(6255,15195) 6260,15190 6290,15190 6300,15180 6300,15110 6280,15090 6280,15008.58 6300,14988.58 JP2_BANK3.14@6333.98,14988.58 ; R88_PD21.2@8770,15055 8775,15050 9005,15050 ; v1(8995,15100) 9005,15085 9005,15050 ; U1_PD21.8@9082.37,15070 9050,15070 9030,15050 9005,15050
K5_BANK4: JP2_BANK4.14 R88_PD29.2 U1_PD29.8 | length 3587.1
  TopLayer w4: v1(6255,15855) 6255,15910 6265,15920 6795,15920 6815,15900 7525,15900 7545,15880 8260,15880 8280,15860 8985,15860 8995,15850 v1(8995,15760)
  BottomLayer w4: v1(6255,15855) 6260,15850 6290,15850 6300,15840 6300,15770 6280,15750 6280,15668.58 6300,15648.58 JP2_BANK4.14@6333.98,15648.58 ; R88_PD29.2@8770,15715 8775,15710 9005,15710 ; v1(8995,15760) 9005,15745 9005,15710 ; U1_PD29.8@9082.37,15730 9050,15730 9030,15710 9005,15710
K6_BANK1: JP2_BANK1.15 R88_PD6.2 U1_PD6.8 | length 2730.4
  TopLayer w4: v1(6290,13910) 6310,13910 6320,13920 6785,13920 6805,13900 7515,13900 7535,13880 8245,13880 8255,13870 v1(8255,13780)
  BottomLayer w4: v1(6290,13910) 6290,13885 6308,13867 6308,13786.69 6290,13768.69 6290,13698.27 6300,13688.27 JP2_BANK1.15@6333.98,13688.27 ; R88_PD6.2@8030,13735 8035,13730 8265,13730 ; v1(8255,13780) 8265,13765 8265,13730 ; U1_PD6.8@8342.37,13750 8310,13750 8290,13730 8265,13730
K6_BANK2: JP2_BANK2.15 R88_PD14.2 U1_PD14.8 | length 2730.4
  TopLayer w4: v1(6290,14570) 6310,14570 6320,14580 6785,14580 6805,14560 7515,14560 7535,14540 8245,14540 8255,14530 v1(8255,14440)
  BottomLayer w4: v1(6290,14570) 6290,14545 6308,14527 6308,14446.69 6290,14428.69 6290,14358.27 6300,14348.27 JP2_BANK2.15@6333.98,14348.27 ; R88_PD14.2@8030,14395 8035,14390 8265,14390 ; v1(8255,14440) 8265,14425 8265,14390 ; U1_PD14.8@8342.37,14410 8310,14410 8290,14390 8265,14390
K6_BANK3: JP2_BANK3.15 R88_PD22.2 U1_PD22.8 | length 2730.4
  TopLayer w4: v1(6290,15230) 6310,15230 6320,15240 6785,15240 6805,15220 7515,15220 7535,15200 8245,15200 8255,15190 v1(8255,15100)
  BottomLayer w4: v1(6290,15230) 6290,15205 6308,15187 6308,15106.69 6290,15088.69 6290,15018.27 6300,15008.27 JP2_BANK3.15@6333.98,15008.27 ; R88_PD22.2@8030,15055 8035,15050 8265,15050 ; v1(8255,15100) 8265,15085 8265,15050 ; U1_PD22.8@8342.37,15070 8310,15070 8290,15050 8265,15050
K6_BANK4: JP2_BANK4.15 R88_PD30.2 U1_PD30.8 | length 2730.4
  TopLayer w4: v1(6290,15890) 6310,15890 6320,15900 6785,15900 6805,15880 7515,15880 7535,15860 8245,15860 8255,15850 v1(8255,15760)
  BottomLayer w4: v1(6290,15890) 6290,15865 6308,15847 6308,15766.69 6290,15748.69 6290,15678.27 6300,15668.27 JP2_BANK4.15@6333.98,15668.27 ; R88_PD30.2@8030,15715 8035,15710 8265,15710 ; v1(8255,15760) 8265,15745 8265,15710 ; U1_PD30.8@8342.37,15730 8310,15730 8290,15710 8265,15710
K7_BANK1: JP2_BANK1.16 R88_PD7.2 U1_PD7.8 | length 1927.3
  TopLayer w4: v1(6325,13815) 6310,13830 6310,13850 6325,13865 6350,13865 6385,13900 6775,13900 6795,13880 7505,13880 7515,13870 v1(7515,13780)
  BottomLayer w4: v1(6325,13815) 6360,13815 6375,13800 6375,13720 6362.95,13707.95 JP2_BANK1.16@6333.98,13707.95 ; R88_PD7.2@7290,13735 7295,13730 7525,13730 ; v1(7515,13780) 7525,13765 7525,13730 ; U1_PD7.8@7602.37,13750 7570,13750 7550,13730 7525,13730
K7_BANK2: JP2_BANK2.16 R88_PD15.2 U1_PD15.8 | length 1927.3
  TopLayer w4: v1(6325,14475) 6310,14490 6310,14510 6325,14525 6350,14525 6385,14560 6775,14560 6795,14540 7505,14540 7515,14530 v1(7515,14440)
  BottomLayer w4: v1(6325,14475) 6360,14475 6375,14460 6375,14380 6362.95,14367.95 JP2_BANK2.16@6333.98,14367.95 ; R88_PD15.2@7290,14395 7295,14390 7525,14390 ; v1(7515,14440) 7525,14425 7525,14390 ; U1_PD15.8@7602.37,14410 7570,14410 7550,14390 7525,14390
K7_BANK3: JP2_BANK3.16 R88_PD23.2 U1_PD23.8 | length 1927.3
  TopLayer w4: v1(6325,15135) 6310,15150 6310,15170 6325,15185 6350,15185 6385,15220 6775,15220 6795,15200 7505,15200 7515,15190 v1(7515,15100)
  BottomLayer w4: v1(6325,15135) 6360,15135 6375,15120 6375,15040 6362.95,15027.95 JP2_BANK3.16@6333.98,15027.95 ; R88_PD23.2@7290,15055 7295,15050 7525,15050 ; v1(7515,15100) 7525,15085 7525,15050 ; U1_PD23.8@7602.37,15070 7570,15070 7550,15050 7525,15050
K7_BANK4: JP2_BANK4.16 R88_PD31.2 U1_PD31.8 | length 1927.3
  TopLayer w4: v1(6325,15795) 6310,15810 6310,15830 6325,15845 6350,15845 6385,15880 6775,15880 6795,15860 7505,15860 7515,15850 v1(7515,15760)
  BottomLayer w4: v1(6325,15795) 6360,15795 6375,15780 6375,15700 6362.95,15687.95 JP2_BANK4.16@6333.98,15687.95 ; R88_PD31.2@7290,15715 7295,15710 7525,15710 ; v1(7515,15760) 7525,15745 7525,15710 ; U1_PD31.8@7602.37,15730 7570,15730 7550,15710 7525,15710
K8_BANK1: JP2_BANK1.17 R88_PD8.2 U1_PD8.8 | length 1114.2
  TopLayer w4: v2(6355,13795) 6375,13795 6385,13805 6385,13820 6365,13840 6365,13850 6395,13880 6765,13880 6775,13870 v1(6775,13780)
  BottomLayer w4: JP2_BANK1.17@6333.98,13727.64 6302.36,13727.64 6300,13730 6300,13765 6330,13795 6345,13795 v2@6350,13800 ; R88_PD8.2@6550,13735 6555,13730 6785,13730 ; v1(6775,13780) 6785,13765 6785,13730 ; U1_PD8.8@6862.37,13750 6830,13750 6810,13730 6785,13730
K8_BANK2: JP2_BANK2.17 R88_PD16.2 U1_PD16.8 | length 1114.2
  TopLayer w4: v2(6355,14455) 6375,14455 6385,14465 6385,14480 6365,14500 6365,14510 6395,14540 6765,14540 6775,14530 v1(6775,14440)
  BottomLayer w4: JP2_BANK2.17@6333.98,14387.64 6302.36,14387.64 6300,14390 6300,14425 6330,14455 6345,14455 v2@6350,14460 ; R88_PD16.2@6550,14395 6555,14390 6785,14390 ; v1(6775,14440) 6785,14425 6785,14390 ; U1_PD16.8@6862.37,14410 6830,14410 6810,14390 6785,14390
K8_BANK3: JP2_BANK3.17 R88_PD24.2 U1_PD24.8 | length 1114.2
  TopLayer w4: v2(6355,15115) 6375,15115 6385,15125 6385,15140 6365,15160 6365,15170 6395,15200 6765,15200 6775,15190 v1(6775,15100)
  BottomLayer w4: JP2_BANK3.17@6333.98,15047.64 6302.36,15047.64 6300,15050 6300,15085 6330,15115 6345,15115 v2@6350,15120 ; R88_PD24.2@6550,15055 6555,15050 6785,15050 ; v1(6775,15100) 6785,15085 6785,15050 ; U1_PD24.8@6862.37,15070 6830,15070 6810,15050 6785,15050
K8_BANK4: JP2_BANK4.17 R88_PD32.2 U1_PD32.8 | length 1085.9
  TopLayer w4: v2(6355,15775) 6365,15785 6365,15830 6395,15860 6765,15860 6775,15850 v1(6775,15760)
  BottomLayer w4: JP2_BANK4.17@6333.98,15707.64 6302.36,15707.64 6300,15710 6300,15745 6330,15775 6345,15775 v2@6350,15780 ; R88_PD32.2@6550,15715 6555,15710 6785,15710 ; v1(6775,15760) 6785,15745 6785,15710 ; U1_PD32.8@6862.37,15730 6830,15730 6810,15710 6785,15710
N6_PD1: C6_PD1.2 D1_PD1.2 R5_PD1.1 U1_PD1.10 | length 1647
  TopLayer w4: U1_PD1.10@6657.63,13650 6600,13650 6600,13490 6590,13480 C6_PD1.2@6560,13479.99 6560,13440 6570,13430 6610,13430 6675,13365 6675,13310 6665,13300 6461,13300 R5_PD1.1@6439,13322 6417,13322 6403,13336 6403,13843 6420,13860 6700,13860 6705.01,13854.99 D1_PD1.2@6705.01,13825 D1_PD1.2@6705.01,13820
N6_PD2: C6_PD2.2 D1_PD2.2 R5_PD2.1 U1_PD2.10 | length 1647
  TopLayer w4: U1_PD2.10@7397.63,13650 7340,13650 7340,13490 7330,13480 C6_PD2.2@7300,13479.99 7300,13440 7310,13430 7350,13430 7415,13365 7415,13310 7405,13300 7201,13300 R5_PD2.1@7179,13322 7157,13322 7143,13336 7143,13843 7160,13860 7440,13860 7445.01,13854.99 D1_PD2.2@7445.01,13825 D1_PD2.2@7445.01,13820
N6_PD3: C6_PD3.2 D1_PD3.2 R5_PD3.1 U1_PD3.10 | length 1647
  TopLayer w4: U1_PD3.10@8137.63,13650 8080,13650 8080,13490 8070,13480 C6_PD3.2@8040,13479.99 8040,13440 8050,13430 8090,13430 8155,13365 8155,13310 8145,13300 7941,13300 R5_PD3.1@7919,13322 7897,13322 7883,13336 7883,13843 7900,13860 8180,13860 8185.01,13854.99 D1_PD3.2@8185.01,13825 D1_PD3.2@8185.01,13820
N6_PD4: C6_PD4.2 D1_PD4.2 R5_PD4.1 U1_PD4.10 | length 1647
  TopLayer w4: U1_PD4.10@8877.63,13650 8820,13650 8820,13490 8810,13480 C6_PD4.2@8780,13479.99 8780,13440 8790,13430 8830,13430 8895,13365 8895,13310 8885,13300 8681,13300 R5_PD4.1@8659,13322 8637,13322 8623,13336 8623,13843 8640,13860 8920,13860 8925.01,13854.99 D1_PD4.2@8925.01,13825 D1_PD4.2@8925.01,13820
N6_PD5: C6_PD5.2 D1_PD5.2 R5_PD5.1 U1_PD5.10 | length 1647
  BottomLayer w4: D1_PD5.2@9034.99,13820 D1_PD5.2@9034.99,13825 9034.99,13854.99 9040,13860 9320,13860 9337,13843 9337,13336 9323,13322 R5_PD5.1@9301,13322 9279,13300 9075,13300 9065,13310 9065,13365 9130,13430 9170,13430 9180,13440 C6_PD5.2@9180,13479.99 9150,13480 9140,13490 9140,13650 U1_PD5.10@9082.37,13650
N6_PD6: C6_PD6.2 D1_PD6.2 R5_PD6.1 U1_PD6.10 | length 1647
  BottomLayer w4: D1_PD6.2@8294.99,13820 D1_PD6.2@8294.99,13825 8294.99,13854.99 8300,13860 8580,13860 8597,13843 8597,13336 8583,13322 R5_PD6.1@8561,13322 8539,13300 8335,13300 8325,13310 8325,13365 8390,13430 8430,13430 8440,13440 C6_PD6.2@8440,13479.99 8410,13480 8400,13490 8400,13650 U1_PD6.10@8342.37,13650
N6_PD7: C6_PD7.2 D1_PD7.2 R5_PD7.1 U1_PD7.10 | length 1647
  BottomLayer w4: D1_PD7.2@7554.99,13820 D1_PD7.2@7554.99,13825 7554.99,13854.99 7560,13860 7840,13860 7857,13843 7857,13336 7843,13322 R5_PD7.1@7821,13322 7799,13300 7595,13300 7585,13310 7585,13365 7650,13430 7690,13430 7700,13440 C6_PD7.2@7700,13479.99 7670,13480 7660,13490 7660,13650 U1_PD7.10@7602.37,13650
N6_PD8: C6_PD8.2 D1_PD8.2 R5_PD8.1 U1_PD8.10 | length 1647
  BottomLayer w4: D1_PD8.2@6814.99,13820 D1_PD8.2@6814.99,13825 6814.99,13854.99 6820,13860 7100,13860 7117,13843 7117,13336 7103,13322 R5_PD8.1@7081,13322 7059,13300 6855,13300 6845,13310 6845,13365 6910,13430 6950,13430 6960,13440 C6_PD8.2@6960,13479.99 6930,13480 6920,13490 6920,13650 U1_PD8.10@6862.37,13650
N6_PD9: C6_PD9.2 D1_PD9.2 R5_PD9.1 U1_PD9.10 | length 1647
  TopLayer w4: U1_PD9.10@6657.63,14310 6600,14310 6600,14150 6590,14140 C6_PD9.2@6560,14139.99 6560,14100 6570,14090 6610,14090 6675,14025 6675,13970 6665,13960 6461,13960 R5_PD9.1@6439,13982 6417,13982 6403,13996 6403,14503 6420,14520 6700,14520 6705.01,14514.99 D1_PD9.2@6705.01,14485 D1_PD9.2@6705.01,14480
N6_PD10: C6_PD10.2 D1_PD10.2 R5_PD10.1 U1_PD10.10 | length 1647
  TopLayer w4: U1_PD10.10@7397.63,14310 7340,14310 7340,14150 7330,14140 C6_PD10.2@7300,14139.99 7300,14100 7310,14090 7350,14090 7415,14025 7415,13970 7405,13960 7201,13960 R5_PD10.1@7179,13982 7157,13982 7143,13996 7143,14503 7160,14520 7440,14520 7445.01,14514.99 D1_PD10.2@7445.01,14485 D1_PD10.2@7445.01,14480
N6_PD11: C6_PD11.2 D1_PD11.2 R5_PD11.1 U1_PD11.10 | length 1647
  TopLayer w4: U1_PD11.10@8137.63,14310 8080,14310 8080,14150 8070,14140 C6_PD11.2@8040,14139.99 8040,14100 8050,14090 8090,14090 8155,14025 8155,13970 8145,13960 7941,13960 R5_PD11.1@7919,13982 7897,13982 7883,13996 7883,14503 7900,14520 8180,14520 8185.01,14514.99 D1_PD11.2@8185.01,14485 D1_PD11.2@8185.01,14480
N6_PD12: C6_PD12.2 D1_PD12.2 R5_PD12.1 U1_PD12.10 | length 1647
  TopLayer w4: U1_PD12.10@8877.63,14310 8820,14310 8820,14150 8810,14140 C6_PD12.2@8780,14139.99 8780,14100 8790,14090 8830,14090 8895,14025 8895,13970 8885,13960 8681,13960 R5_PD12.1@8659,13982 8637,13982 8623,13996 8623,14503 8640,14520 8920,14520 8925.01,14514.99 D1_PD12.2@8925.01,14485 D1_PD12.2@8925.01,14480
N6_PD13: C6_PD13.2 D1_PD13.2 R5_PD13.1 U1_PD13.10 | length 1647
  BottomLayer w4: D1_PD13.2@9034.99,14480 D1_PD13.2@9034.99,14485 9034.99,14514.99 9040,14520 9320,14520 9337,14503 9337,13996 9323,13982 R5_PD13.1@9301,13982 9279,13960 9075,13960 9065,13970 9065,14025 9130,14090 9170,14090 9180,14100 C6_PD13.2@9180,14139.99 9150,14140 9140,14150 9140,14310 U1_PD13.10@9082.37,14310
N6_PD14: C6_PD14.2 D1_PD14.2 R5_PD14.1 U1_PD14.10 | length 1647
  BottomLayer w4: D1_PD14.2@8294.99,14480 D1_PD14.2@8294.99,14485 8294.99,14514.99 8300,14520 8580,14520 8597,14503 8597,13996 8583,13982 R5_PD14.1@8561,13982 8539,13960 8335,13960 8325,13970 8325,14025 8390,14090 8430,14090 8440,14100 C6_PD14.2@8440,14139.99 8410,14140 8400,14150 8400,14310 U1_PD14.10@8342.37,14310
N6_PD15: C6_PD15.2 D1_PD15.2 R5_PD15.1 U1_PD15.10 | length 1647
  BottomLayer w4: D1_PD15.2@7554.99,14480 D1_PD15.2@7554.99,14485 7554.99,14514.99 7560,14520 7840,14520 7857,14503 7857,13996 7843,13982 R5_PD15.1@7821,13982 7799,13960 7595,13960 7585,13970 7585,14025 7650,14090 7690,14090 7700,14100 C6_PD15.2@7700,14139.99 7670,14140 7660,14150 7660,14310 U1_PD15.10@7602.37,14310
N6_PD16: C6_PD16.2 D1_PD16.2 R5_PD16.1 U1_PD16.10 | length 1647
  BottomLayer w4: D1_PD16.2@6814.99,14480 D1_PD16.2@6814.99,14485 6814.99,14514.99 6820,14520 7100,14520 7117,14503 7117,13996 7103,13982 R5_PD16.1@7081,13982 7059,13960 6855,13960 6845,13970 6845,14025 6910,14090 6950,14090 6960,14100 C6_PD16.2@6960,14139.99 6930,14140 6920,14150 6920,14310 U1_PD16.10@6862.37,14310
N6_PD17: C6_PD17.2 D1_PD17.2 R5_PD17.1 U1_PD17.10 | length 1647
  TopLayer w4: U1_PD17.10@6657.63,14970 6600,14970 6600,14810 6590,14800 C6_PD17.2@6560,14799.99 6560,14760 6570,14750 6610,14750 6675,14685 6675,14630 6665,14620 6461,14620 R5_PD17.1@6439,14642 6417,14642 6403,14656 6403,15163 6420,15180 6700,15180 6705.01,15174.99 D1_PD17.2@6705.01,15145 D1_PD17.2@6705.01,15140
N6_PD18: C6_PD18.2 D1_PD18.2 R5_PD18.1 U1_PD18.10 | length 1647
  TopLayer w4: U1_PD18.10@7397.63,14970 7340,14970 7340,14810 7330,14800 C6_PD18.2@7300,14799.99 7300,14760 7310,14750 7350,14750 7415,14685 7415,14630 7405,14620 7201,14620 R5_PD18.1@7179,14642 7157,14642 7143,14656 7143,15163 7160,15180 7440,15180 7445.01,15174.99 D1_PD18.2@7445.01,15145 D1_PD18.2@7445.01,15140
N6_PD19: C6_PD19.2 D1_PD19.2 R5_PD19.1 U1_PD19.10 | length 1647
  TopLayer w4: U1_PD19.10@8137.63,14970 8080,14970 8080,14810 8070,14800 C6_PD19.2@8040,14799.99 8040,14760 8050,14750 8090,14750 8155,14685 8155,14630 8145,14620 7941,14620 R5_PD19.1@7919,14642 7897,14642 7883,14656 7883,15163 7900,15180 8180,15180 8185.01,15174.99 D1_PD19.2@8185.01,15145 D1_PD19.2@8185.01,15140